# Altium PCB CH340T3R-R0.PcbDoc
Units mil, origin at the board's own origin, x right, y up, seen from the top; angles counter-clockwise.
Board outline 1352.27 x 575.04 mil, 2 copper layers (Top Layer, Bottom Layer); 17 components, 23 nets, 68 pads, 59 vias.
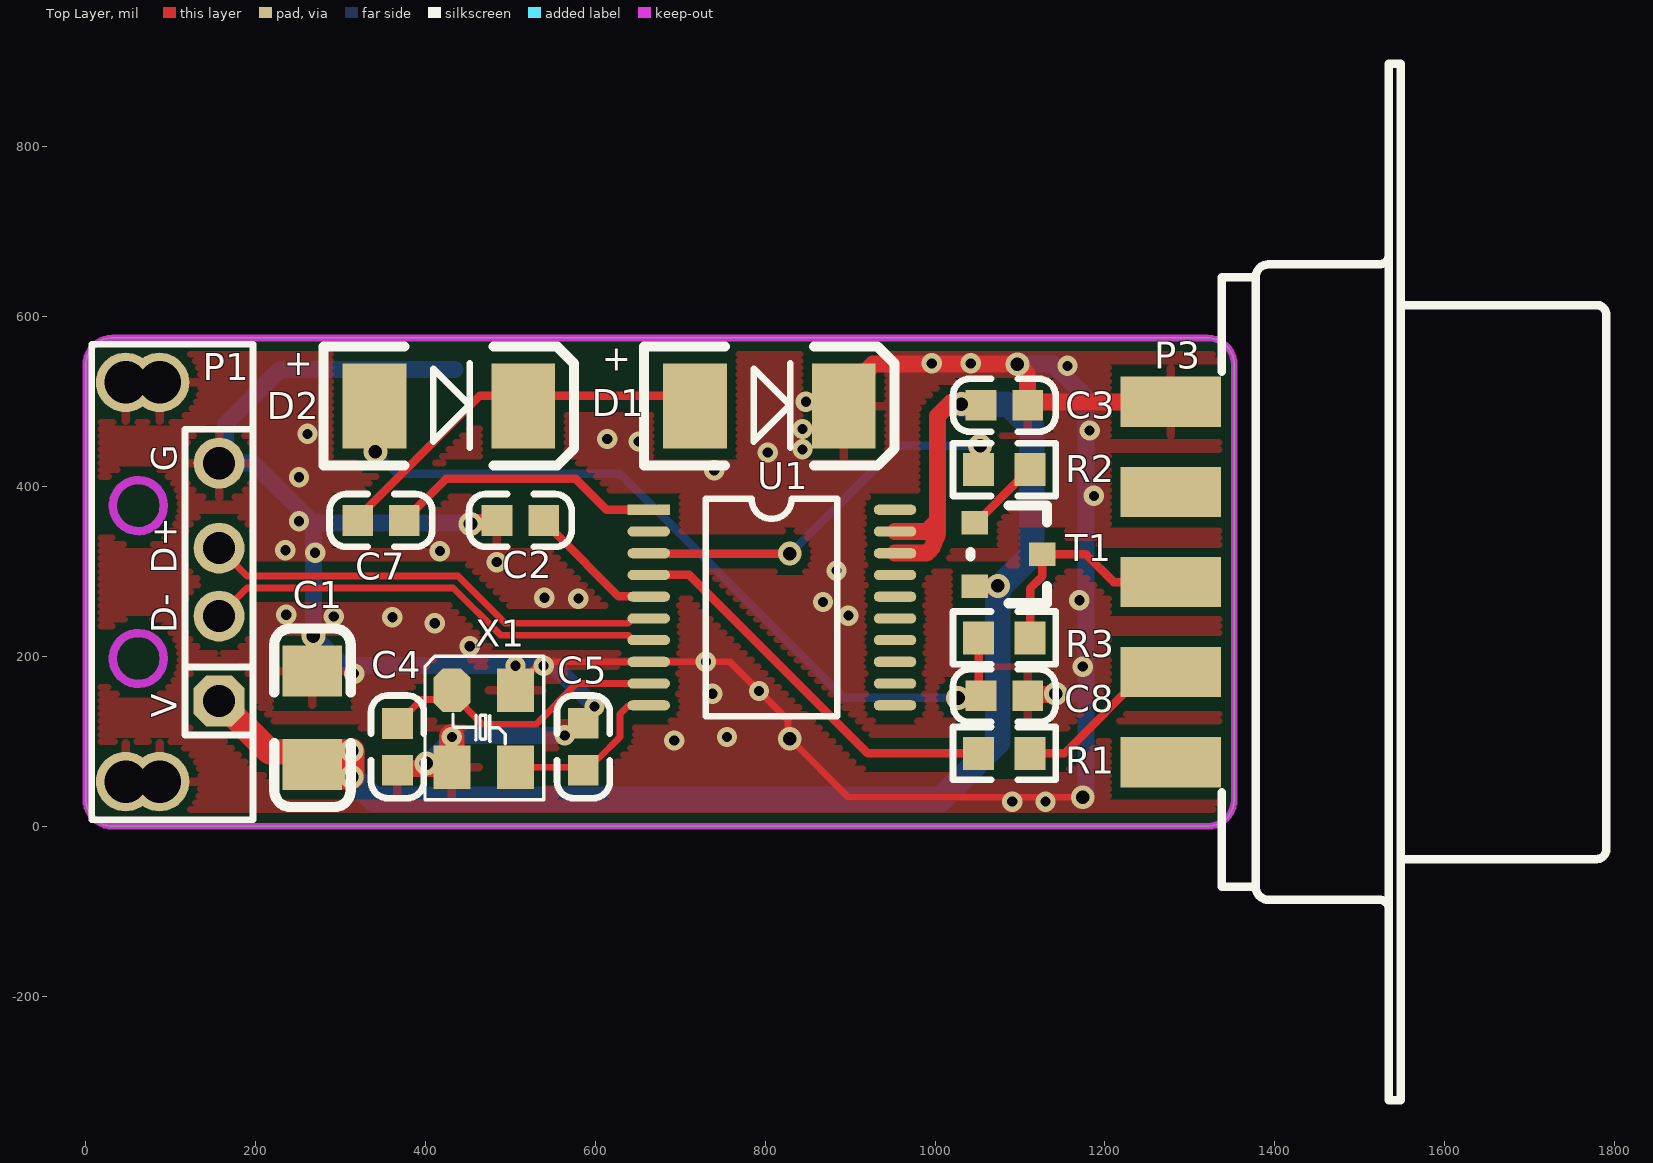
[diagram p0: Top Layer view]
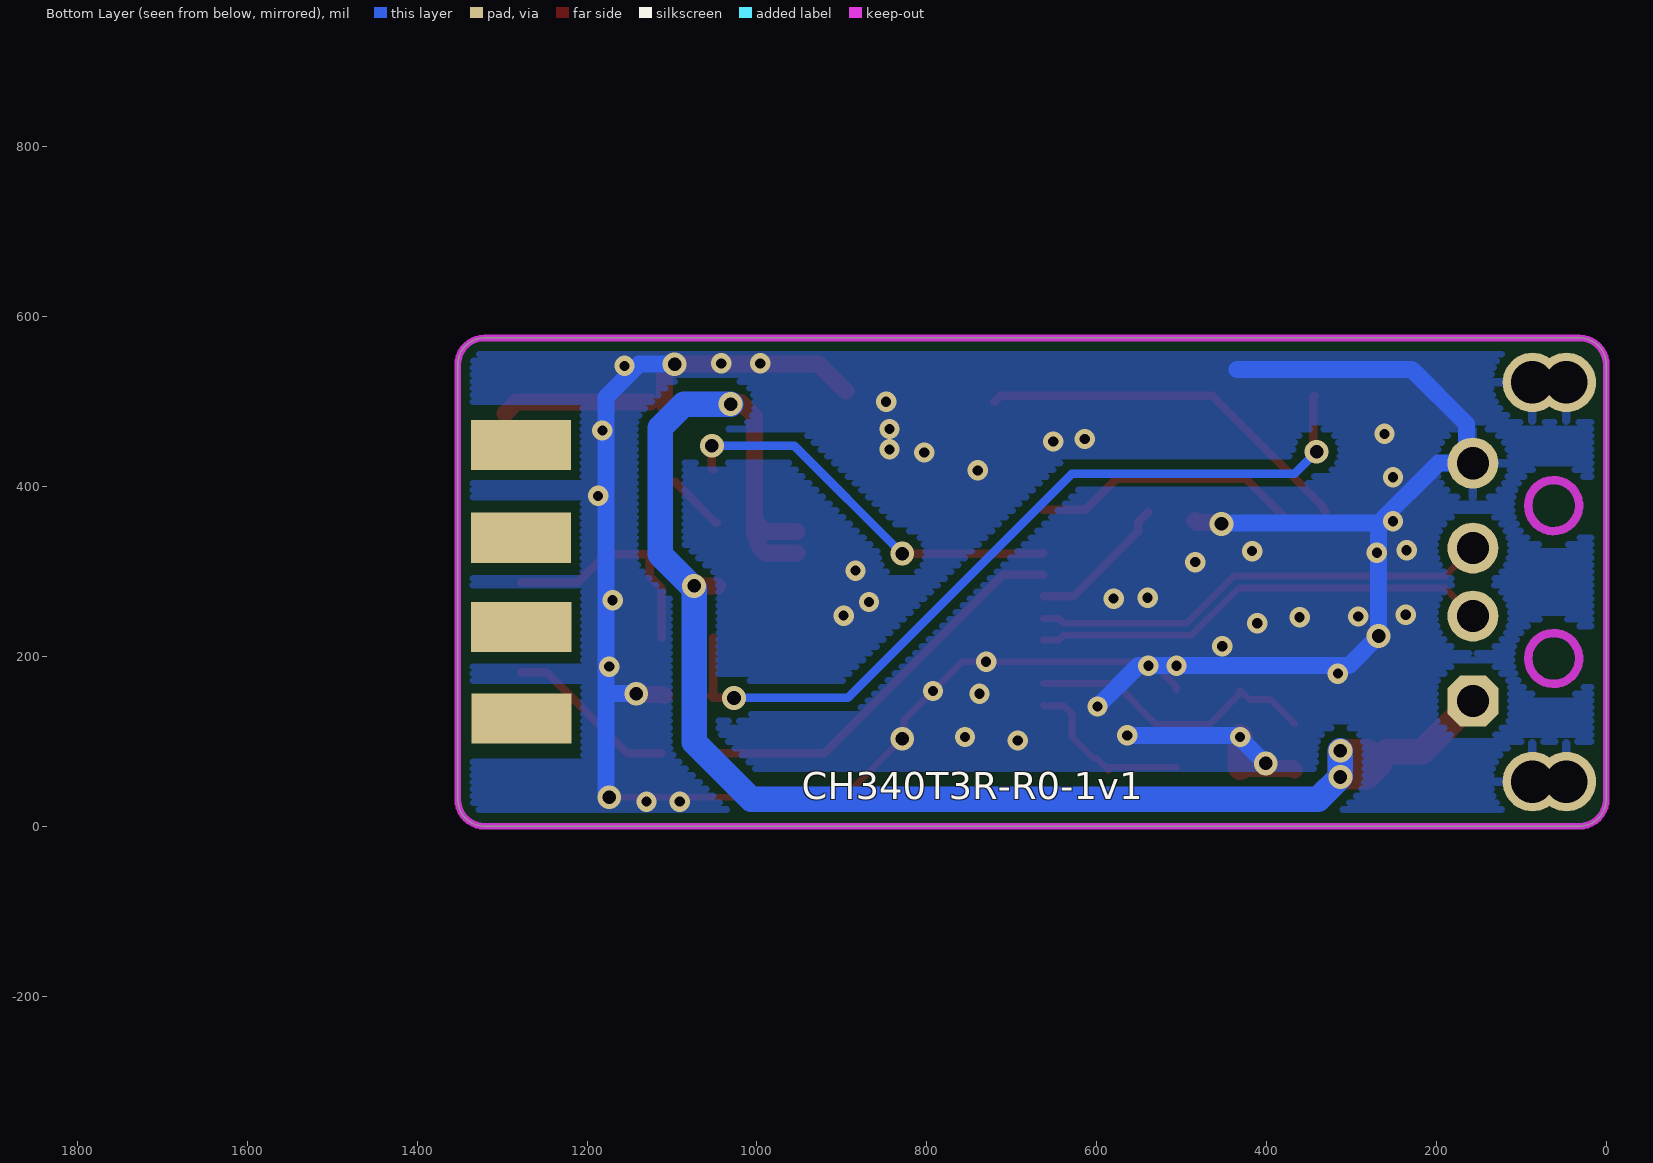
[diagram p1: Bottom Layer view, seen from below]

## Layer stack, top to bottom
Top Solder: solder mask 0.4, Solder Resist, Dk 3.5
Top Layer: signal copper 1.4
Dielectric 1: dielectric 12.6, FR-4, Dk 4.8
Bottom Layer: signal copper 1.4
Bottom Solder: solder mask 0.4, Solder Resist, Dk 3.5

## Board outline
0,31.5 0,543.54 cw(c31.5,543.54) 31.5,575.04 1320.78,575.04 cw(c1320.78,543.54) 1352.27,543.54 1352.27,31.5 cw(c1320.78,31.5) 1320.78,0 31.5,0 cw(c31.5,31.5)

## Design rules (kind name [scope] priority, off if disabled: settings)
Clearance Clearance_1 [InPolygon] p1: gap=10 ignorepadtopadclearanceinfootprint=FALSE
Clearance [All] p2: gap=6 ignorepadtopadclearanceinfootprint=FALSE
ComponentClearance [All] p1 off: gap=10 collisioncheckmode=3 verticalgap=10 showdistances=FALSE
DiffPairsRouting [All] p1: maxlimit=10 minlimit=6 mostfreqgap=7 toplayer_minwidth=6 toplayer_maxwidth=15 toplayer_prefwidth=15 bottomlayer_minwidth=6 bottomlayer_maxwidth=15 bottomlayer_prefwidth=15 maxuncoupledlength=500
MinimumSolderMaskSliver [All] p1 off: minsoldermaskwidth=10
PolygonConnect PolygonConnect_1 [IsVia] p1: connectstyle=Direct reliefconductorwidth=10 reliefentries=4 polygonreliefangle="90 Angle" airgapwidth=10
PolygonConnect [All] p2: connectstyle=Relief reliefconductorwidth=10 reliefentries=4 polygonreliefangle="90 Angle" airgapwidth=10
RoutingVias [All] p1: holewidth=16 width=28 viastyle="Through Hole" minholewidth=12 minwidth=24 maxholewidth=28 maxwidth=50
SilkToSilkClearance [All] p1 off: silktosilkclearance=10
SilkToSolderMaskClearance [IsPad] p1 off: minsilkscreentomaskgap=10 clearancetoexposedcopper=TRUE
SolderMaskExpansion [All] p1: expansion=4 istentingtop=FALSE
Width [All] p1: maxlimit=100 minlimit=6 preferedwidth=10
25 further rules are at their usual default settings.

## Classes and differential pairs
differential pair NewDifferentialPair1: +UD+ -UD-

## Components (designator, comment, footprint, x,y, rotation, side; value= is the part's Value field where it differs from the comment)
C1 "10uF" 3216_C 266.9,72.74 r270 top
C2 "0.1uF" 0603_C 539.16,360 r180 top
C3 "0.1uF" 0603_C 1054.09,495.74 r0 top
C4 "33p" 0603_C 367,121 r270 top
C5 "33p" 0603_C 586,66.02 r90 top
C7 "0.47u" 0603_C 320,360 r0 top
C8 "0.47u" 0603_C 1054.09,153.74 r0 top
D1 "1N5817" 7227+ 892.4,494.74 r180 top
D2 "1N5817" 7227+ 515.04,494.74 r180 top
P1 "USB" USBAM 156.9,147.52 r90 top
P3 "RS232-DB9" DB9-PAD-M 1277.11,75.12 r180 top
R1 "10K" 0603 1051.27,85.74 r0 top
R2 "10K" 0603 1111.9,420 r180 top
R3 "2K2" 0603 1051.27,221.74 r0 top
T1 "9012" SOT-23 1046.68,357.55 r270 top
U1 "CH340T" SSOP20 662.9,372.68 r270 top
X1 "12MHz" XT3225 431.1,160.04 r270 top

## Footprints (in the part's own frame and the unit in brackets; to place one, negate y for a bottom-side part, rotate by r counter-clockwise, add the part's x,y. Pads: shape width x height; smd on the part's side, far side on the other; paste and mask are expansions set on the pad)
0603 [mm]
  rect 0.93x0.98 smd: 1(0,0) 2(1.54,0)
  silkscreen extent -0.76,-0.79 2.3,0.79
0603_C [mil]
  rect 36x36 smd: 1(0,0) 2(55,0)
  silkscreen extent -33,-31 88,31
3216_C [mil]
  rect 60x70 smd: 1(0,0) 2(-110,0)
  silkscreen extent -160,-45 50,45
7227+ [mil]
  rect 75x100 smd: 1(175,0) 2(0,0)
  silkscreen extent -60,-70 235,70
DB9-PAD-M [mm]
  rect 3x1.5 smd: 1(-0.01,-0.005) 2(-0.01,-2.7) 3(-0.01,-5.395) 4(-0.01,-8.09) 5(-0.01,-10.785)
  rect 3x1.5 smd far side: 6(-0.002,-1.315) 7(-0.012,-4.05) 8(-0.02,-6.717) 9(-0.02,-9.493)
  silkscreen extent -13.03,-20.89 -1.53,10.11
SOT-23 [mm]
  rect 0.7x0.8 smd: 1(0,0) 2(1.9,0) 3(0.95,2.02)
  silkscreen extent -0.51,-0.13 2.41,2.16
SSOP20 [mil]
  rect 12x50 smd: 1(0,0)
  oval 12x50 smd: 2(25.6,0) 3(51.2,0) 4(76.8,0) 5(102.4,0) 6(128,0) 7(153.5,0) 8(179.1,0) 9(204.7,0) 10(230.3,0) 11(230.3,290) 12(204.7,290) 13(179.1,290) 14(153.5,290) 15(128,290) 16(102.4,290) 17(76.8,290) 18(51.2,290) 19(25.6,290) 20(0,290)
  silkscreen extent -13,67 243,222
USBAM [mil]
  round 70 hole 50: 0(-95,70) 0(-95,110) 0(375,70) 0(375,110)
  oct 60x60 hole 38: 1(0,0)
  round 60 hole 38: 2(100,0) 3(180,0) 4(280,0)
  Keep-Out Layer circle w10: c50,95 r30
  Keep-Out Layer circle w10: c230,95 r30
  silkscreen extent -140,-40 420,150
XT3225 [mm]
  oct 1.3x1.1 smd: 1(0,0)
  rect 1.3x1.1 smd: 2(2.3,0) 3(2.3,1.9) 4(0,1.9)
  silkscreen extent -1.02,-0.8 3.27,2.74

## Part data
C1 C2 C3 C4 C5: library part CAP, "Capacitor"
C7 C8: library part CPA
D1 D2: library part DIODE, "Diode"
P3: library part DB9
R1 R2 R3: library part RES2
T1: library part PNP, "PNP Transistor"
U1: "USB to TTL Serial / UART,  USB to IrDA"
X1: library part CRYSTAL, "Crystal"

## Via types
v1: diameter 24, hole 12, Top Layer to Bottom Layer, tented both sides, 44 vias
v2: diameter 28, hole 16, Top Layer to Bottom Layer, tented both sides, 15 vias

## Nets (pads, with @x,y where several pads share a name; then routed paths per layer and width w, separated by ;. In a path a pad name is that pad's centre, name@x,y a point inside that pad or via, vN(x,y) a via of type N, cw(c..) or ccw(c..) an arc to the next point about the centre after c; other vN are vias at no path point)
ACT: U1.2
CKO: C7.2 U1.1 | length 323.2
  Top Layer w10: C7.2 424,409 577,409 613.32,372.68 U1.1
CTS: U1.11
DCD: U1.14
DSR: U1.12
DTR: U1.15
GND: C1.2 C2.2 C3.2 C4.2 C5.2 C8.2 D1.2 P1.0 P1.4 P3.5 U1.8 X1.2 X1.4 | length 3378.5
  Top Layer w8: X1.4 505.9,163.98 535.5,193.58 U1.8 758.42,193.58 827,125 827,105 v2(829,103) 898,34 v2(1174,34)
  Top Layer w20: C4.2 368.75,67.75 429.35,67.75 X1.2 ; v2(453,356) 454.53,357.53 481.69,357.53 C2.2 ; D1.2@895.4,512.24 927.16,544 v2(1097,544) 1109.09,531.91 C3.2 ; C8.2 1110.22,154.87 1140.87,154.87 v2(1142,156) ; C3.2@1126,499.72 P3.5 1282.92,499.72 P3.5@1296.9,485.74
  Top Layer w30: X1.2 v1(431.1,105.08)
  Bottom Layer w8: 1174,133.08 1174,156 v1(1174,188)
  Bottom Layer w20: v2(401,74) 434,107 v1(564,107) ; 435,538 229,538 164.55,473.55 164.55,435.17 P1.4 156.96,427.45 197.55,427.45 268,357 ; v2(453,356) 452,357 268,357 ; v1(599,141) 551,189 v1(506,189) 303,189 v2(268,224) 268,357 ; v2(1097,544) 1139,544 1178,505 1178,40.16 1174,36.16 v2(1174,34) ; v2(1142,156) 1174,156
  other v1: 1091,29 1130,29 693,101 755,105 738,156 792.71,159.29 315.9,179.74 539.1,189 730.14,193.58 452,212 411,239 361,246 292,247 898,248 236,249 868,264 1170,266 580,268 540,269 884,301 484,311 270,322 417,324 235,325 251,359 1187,389 251,411 740,419 803,440 843.9,443.74 651,453 614,456 261,462 1182,466 843.9,467.74 847.9,499.74 1156,542 996,545 1042,545
NetC2_1: C2.1 U1.5 | length 171
  Top Layer w10: C2.1@539.16,370 551.15,358.01 551.15,346.85 627.34,270.66 U1.5@662.52,270.66
NetC4_1: C4.1 U1.9 X1.1 | length 350.8
  Top Layer w8: C4.1 395.28,149.28 420.33,149.28 X1.1 431.1,156.11 467.2,120 530,120 577.98,167.98 U1.9
NetC5_1: C5.1 U1.10 X1.3 | length 204.4
  Top Layer w8: X1.3 C5.1@586,69.49 ; C5.1 600,80.02 604.02,80.02 629,105 629,132 638.61,141.61 662.13,141.61 U1.10
NetC7_1: C7.1 D1.1 D2.2 | length 451.7
  Top Layer w10: C7.1@330,370 333,373 333,376 463.74,506.74 713.4,506.74 D1.1@720.4,499.74
NetC8_1: C8.1 D2.1 R3.1 | length 965.6
  Top Layer w10: D2.1@343.04,506.74 345,504.78 345,447.22 D2.1@343.78,446 ; v2(1027,151) 1051.35,151 C8.1 1051.27,156.57 R3.1
  Bottom Layer w10: v2(341,441) 367,415 629.13,415 893.13,151 v2(1027,151)
NetR2_1: R2.1 T1.1 | length 70.1
  Top Layer w10: T1.1 1048.65,357.55 R2.1@1096.81,405.71
RI: U1.13
RS232_RXD: P3.2 R1.2 | length 205.2
  Top Layer w10: R1.2 1152.31,85.74 1247.98,181.42 P3.2
RS232_TXD: P3.3 R3.2 T1.3 | length 269.1
  Top Layer w10: R3.2 1111.9,279.9 1126.21,294.21 T1.3 1177.85,320.15 1210.48,287.52 P3.3
RTS: U1.16
RXD: R1.1 U1.4 | length 475.4
  Top Layer w10: U1.4 710.53,295.88 920.66,85.74 R1.1
TNOW: U1.17
TXD: R2.2 U1.3 | length 471.9
  Top Layer w10: U1.3 663.28,321.86 664.14,321 v2(829,321) ; R2.2 1053,421.73 v2(1053,448)
  Bottom Layer w10: v2(829,321) 956,448 v2(1053,448)
UD+: P1.3 U1.6 | length 545.1
  Top Layer w8: P1.3 189.9,294.52 438.48,294.52 494.07,238.93 638.39,238.93 644.14,244.68 U1.6
UD-: P1.2 U1.7 | length 545.1
  Top Layer w8: P1.2 189.9,280.52 432.68,280.52 488.27,224.93 638.39,224.93 644.14,219.18 U1.7
VCC: C1.1 C3.1 P1.1 T1.2 U1.18 U1.19 | length 1898.2
  Top Layer w20: U1.18 987.81,321.48 ccw(c987.81,327.16) 991.82,323.13 ; U1.19 990.08,347.08 1003,360 ; 991.83,323.14 994.27,325.58 ; 994.28,325.59 ccw(c982.85,337) 999,337 ccw(c989.34,346.66) 1003,346.66 1003,360 ; v2@1019,499 1003,483 1003,360 ; T1.2 1046.81,282.87 1073.87,282.87 v2(1074,283)
  Top Layer w30: P1.1 216.68,87.74 259.26,87.74 C1.1@270.58,76.42 ; v2(313,89) v2@311.74,87.74 ; C1.1@270.58,76.42 281.9,87.74 v2@311.74,87.74 ; C1.1@270.58,76.42 C1.1 281.64,58 v2(313,58) 313,86.49 v2@311.74,87.74
  Bottom Layer w30: v2(313,89) v2(313,58) 339,32 1007,32 1074,99 1074,280 1114,320 1114,469 1086,497 v2(1031,497)
pads on no net: P3.1 P3.4 P3.6 P3.7 P3.8 P3.9 U1.20

## Polygon pours and split planes (outlines as drawn)
GND on Bottom Layer "GND_L" (hatched Horizontal grid 8 track 8, remove dead copper, pour order 1): -6,580 -6,3 1355,3 1355,580
GND on Top Layer "GND_L" (hatched Horizontal grid 8 track 8, remove dead copper, pour order 0): -6,580 -6,3 1355,3 1355,580

## Keep-outs
Keep-Out Layer:
  the board outline again, w8

## Silkscreen, mask and mechanical layers (free items; w line width, h text height)
Bottom Overlay:
  text "CH340T3R-R0-1v1" at 947,32 h32
Mechanical 1:
  the board outline again, w8

## Text inside footprints (layer, text, board x,y; h text height)
D1: Top Overlay "+" at 642,562 h30 r180
D2: Top Overlay "+" at 268,557 h30 r180
P1: Top Overlay "D-" at 106.9,227.52 h30 r90; Top Overlay "D+" at 106.9,297.52 h30 r90; Top Overlay "V" at 106.9,127.52 h30 r90; Top Overlay "G" at 106.9,417.52 h30 r90